# Altium PCB RGB.PcbDoc
Units mm, origin at the board's own origin, x right, y up, seen from the top; angles counter-clockwise.
Board outline 37.21 x 27.94 mm, 2 copper layers (Top Layer, Bottom Layer); 50 components, 28 nets, 160 pads, 54 vias.
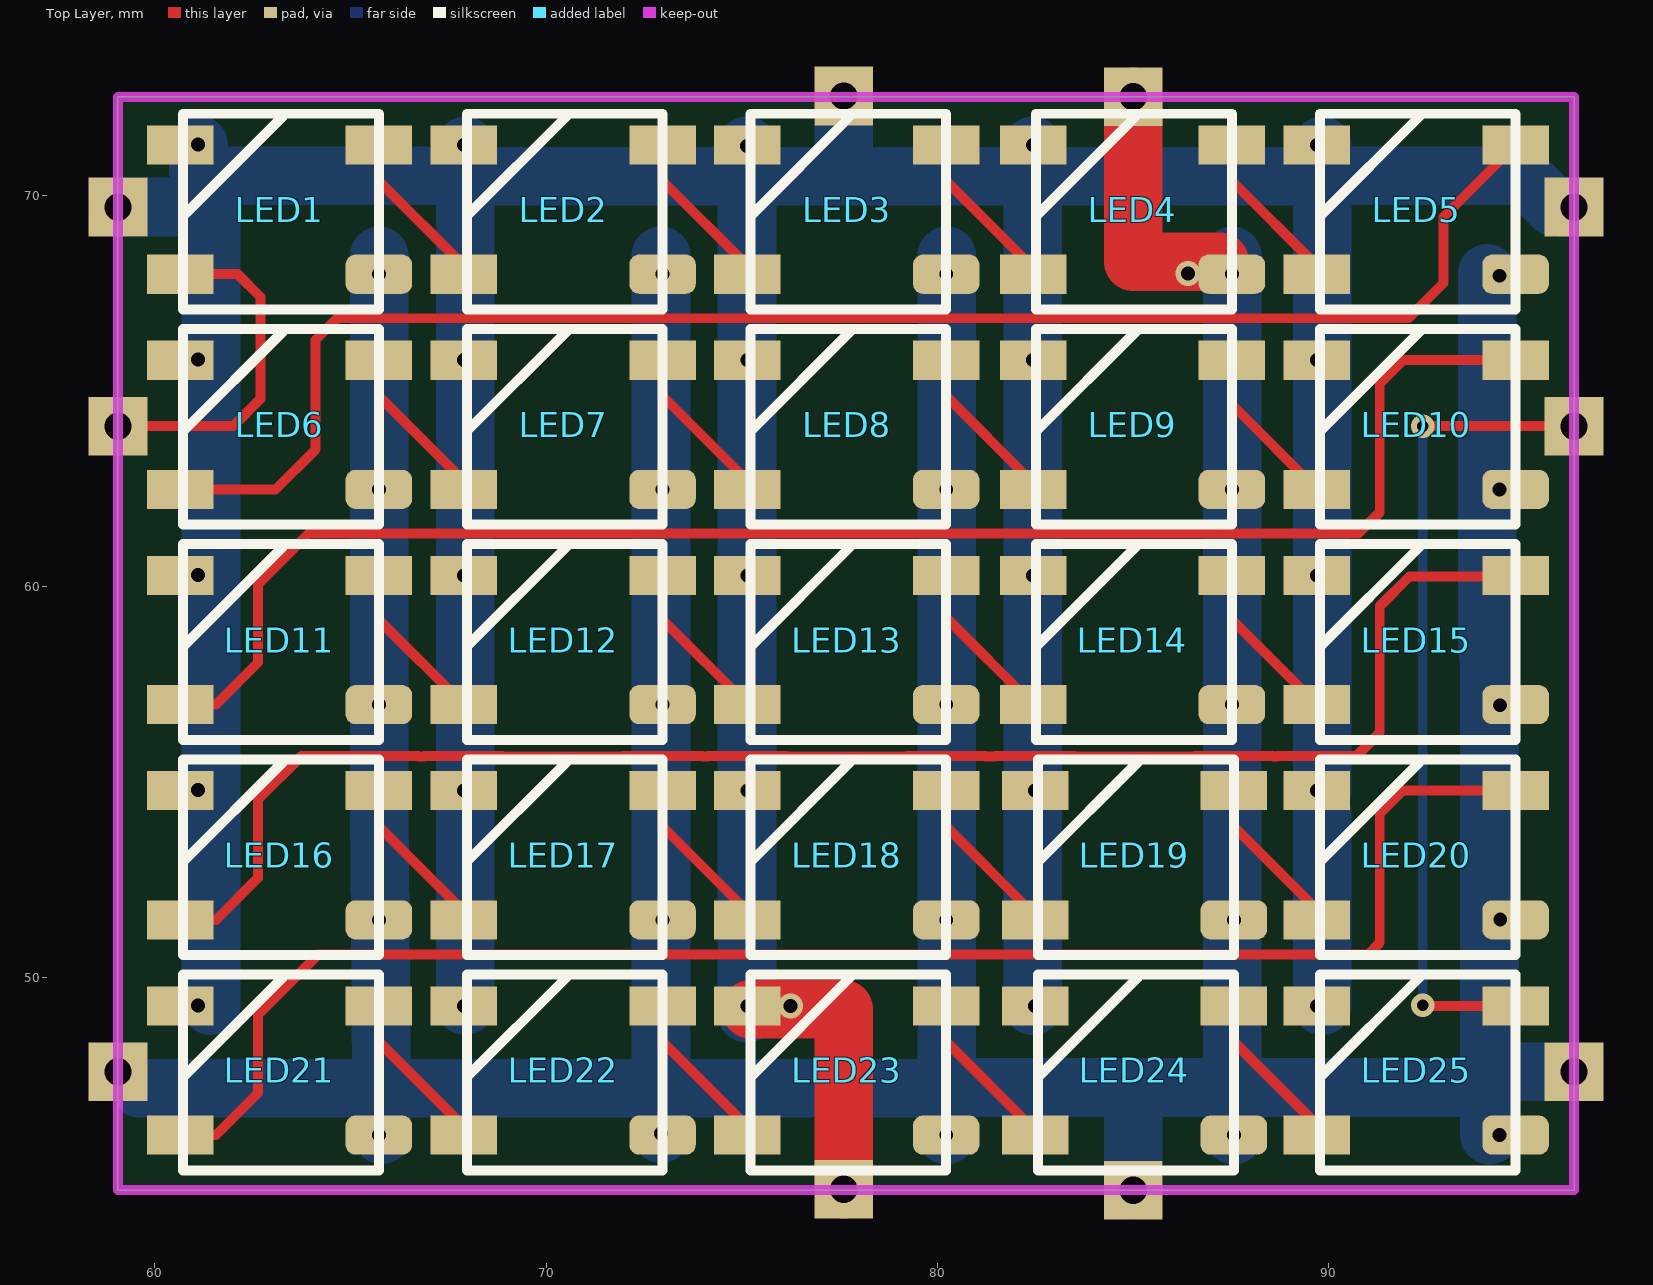
[diagram p0: Top Layer view]
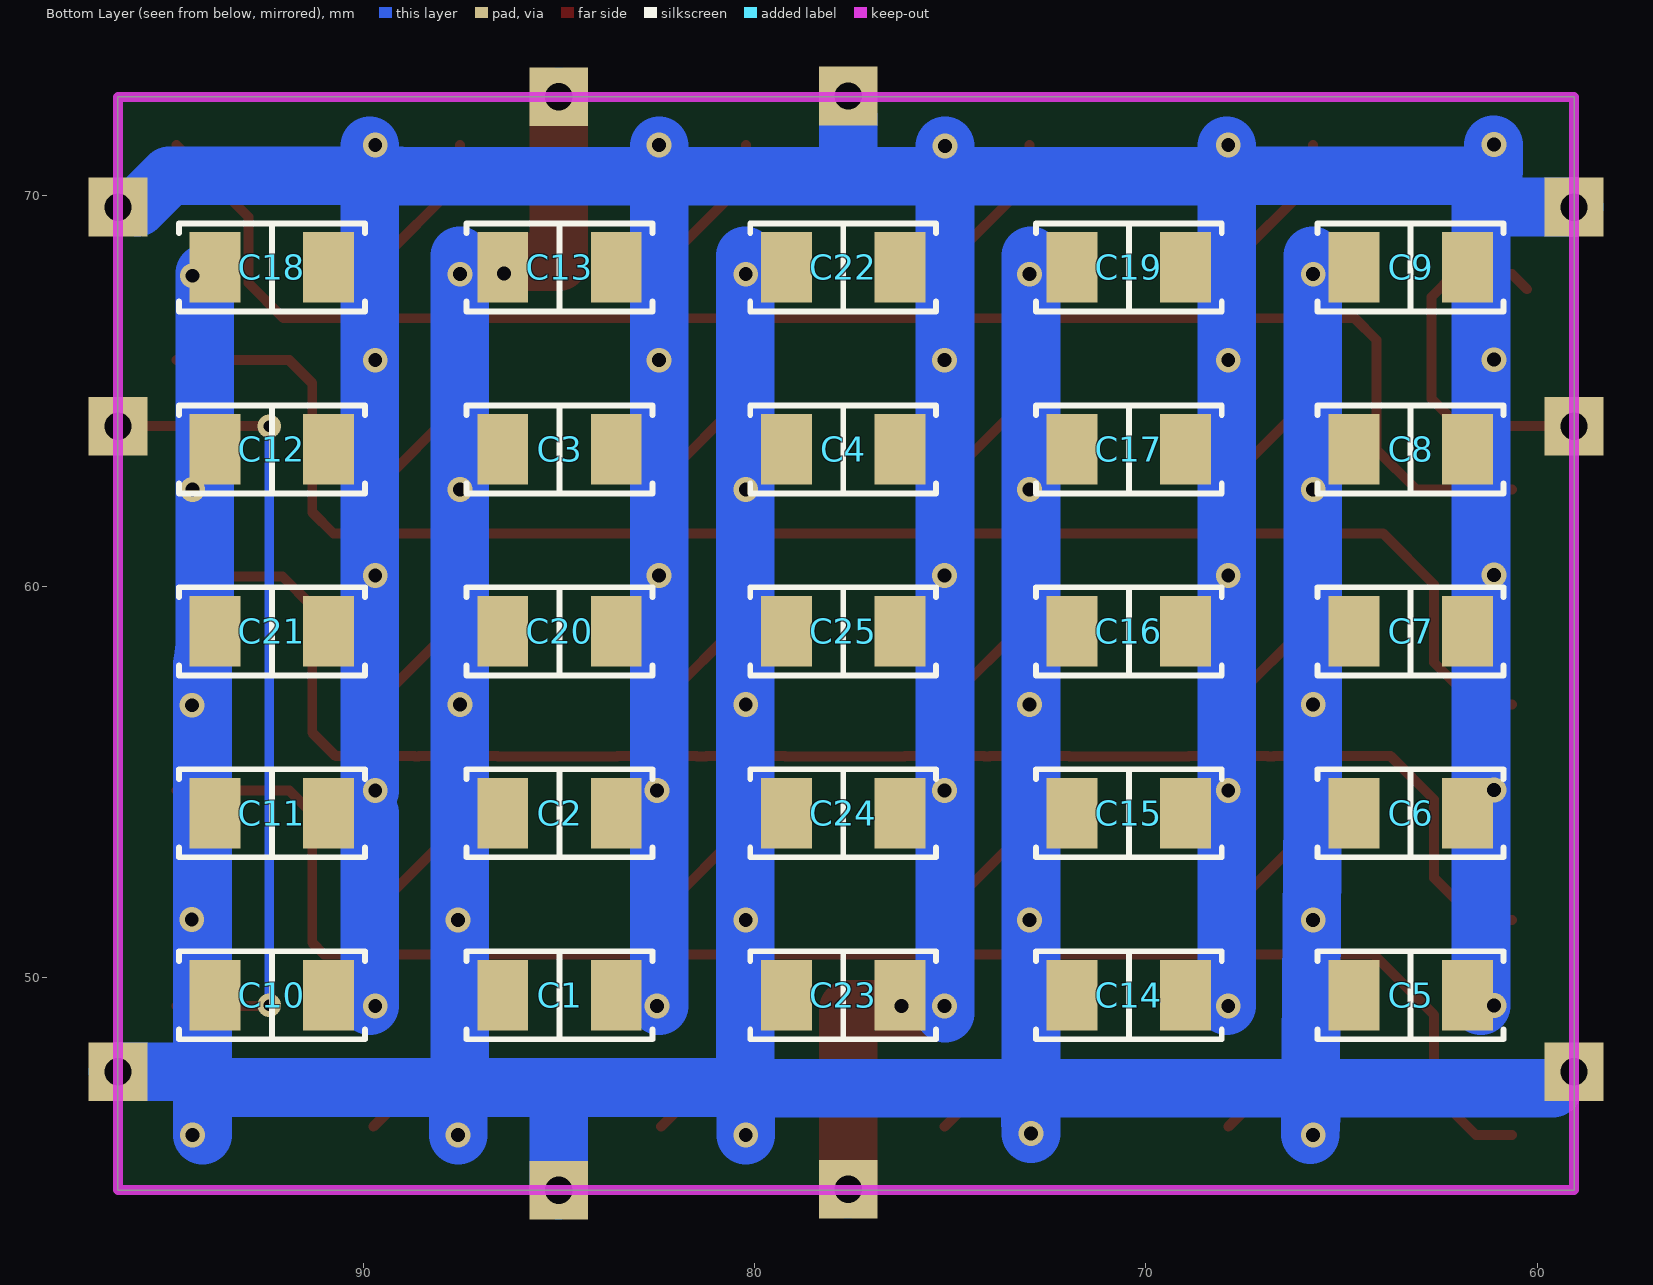
[diagram p1: Bottom Layer view, seen from below]
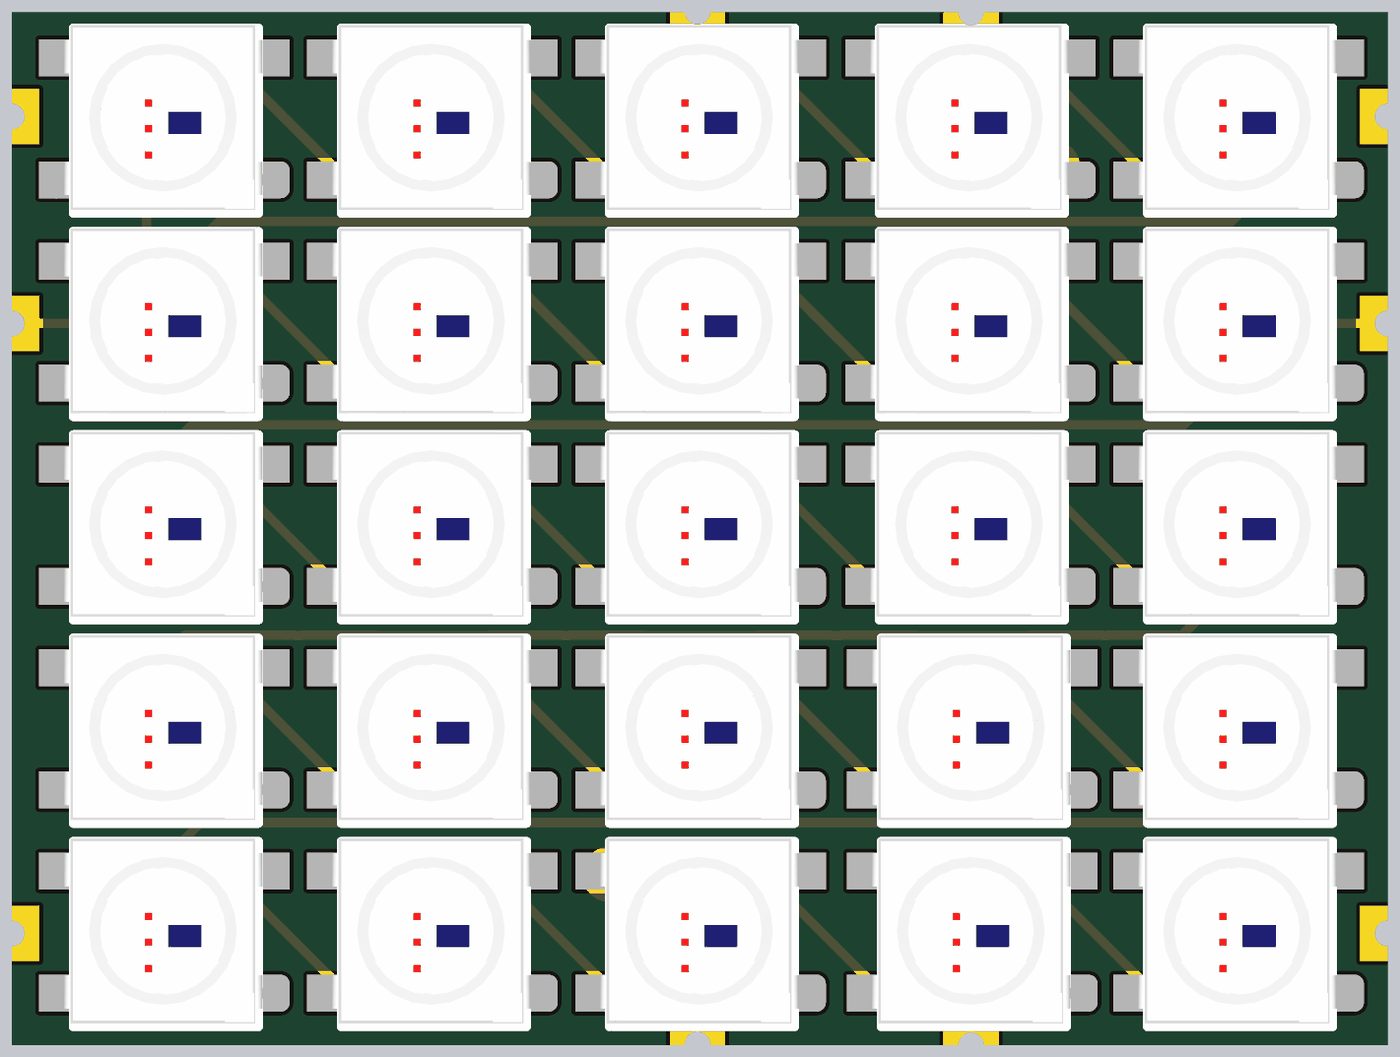
[diagram p2: 3D render of the assembled board from above, using the file's embedded part models]
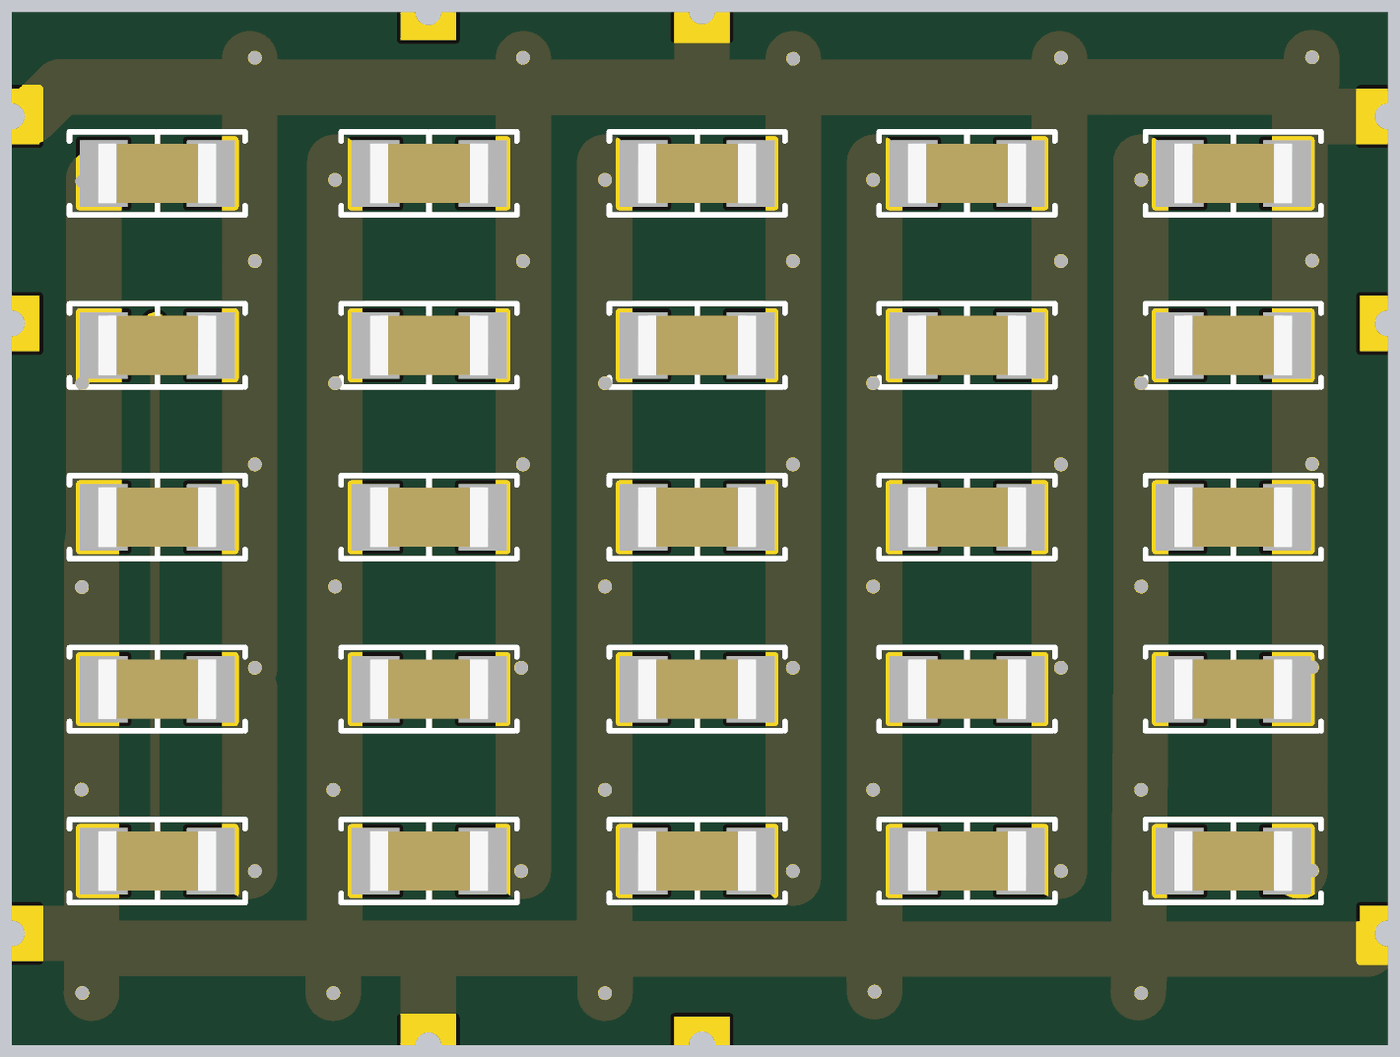
[diagram p3: 3D render of the assembled board from below, using the file's embedded part models]

## Layer stack, top to bottom
Top Solder: solder mask 0.0102, Solder Resist, Dk 3.5
Top Layer: signal copper 0.0356
Dielectric 1: dielectric 0.32, FR-4, Dk 4.8
Bottom Layer: signal copper 0.0356
Bottom Solder: solder mask 0.0102, Solder Resist, Dk 3.5

## Board outline
59.055,44.577 59.055,72.517 96.266,72.517 96.266,44.577

## Design rules (kind name [scope] priority, off if disabled: settings)
Clearance [All] p1: gap=0.254 ignorepadtopadclearanceinfootprint=FALSE except(0: Arc-Hole Track-Hole SMDPad-Hole THPad-Hole Via-Hole Fill-Hole Poly-Hole Region-Hole Text-Hole)
PolygonConnect [All] p1: connectstyle=Relief reliefconductorwidth=0.254 reliefentries=4 polygonreliefangle="90 Angle" airgapwidth=0.254
RoutingVias [All] p1: holewidth=0.711 width=1.27 viastyle="Through Hole" minholewidth=0.711 minwidth=1.27 maxholewidth=0.711 maxwidth=1.27
SolderMaskExpansion [All] p1: expansion=0.102
Width [All] p1: maxlimit=0.254 minlimit=0.254 preferedwidth=0.254
30 further rules are at their usual default settings.

## Components (designator, comment, footprint, x,y, rotation, side; value= is the part's Value field where it differs from the comment)
C1 "100nF" "CAP 1206/3216" 84.982,49.559 r0 bottom value=0.1uF
C2 "100nF" "CAP 1206/3216" 84.982,54.209 r0 bottom value=0.1uF
C3 "100nF" "CAP 1206/3216" 84.982,63.508 r0 bottom value=0.1uF
C4 "100nF" "CAP 1206/3216" 77.732,63.508 r0 bottom value=0.1uF
C5 "100nF" "CAP 1206/3216" 63.232,49.559 r0 bottom value=0.1uF
C6 "100nF" "CAP 1206/3216" 63.232,54.209 r0 bottom value=0.1uF
C7 "100nF" "CAP 1206/3216" 63.232,58.858 r0 bottom value=0.1uF
C8 "100nF" "CAP 1206/3216" 63.232,63.508 r0 bottom value=0.1uF
C9 "100nF" "CAP 1206/3216" 63.232,68.158 r0 bottom value=0.1uF
C10 "100nF" "CAP 1206/3216" 92.332,49.559 r0 bottom value=0.1uF
C11 "100nF" "CAP 1206/3216" 92.332,54.209 r0 bottom value=0.1uF
C12 "100nF" "CAP 1206/3216" 92.332,63.508 r0 bottom value=0.1uF
C13 "100nF" "CAP 1206/3216" 84.982,68.158 r0 bottom value=0.1uF
C14 "100nF" "CAP 1206/3216" 70.432,49.559 r0 bottom value=0.1uF
C15 "100nF" "CAP 1206/3216" 70.432,54.209 r0 bottom value=0.1uF
C16 "100nF" "CAP 1206/3216" 70.432,58.858 r0 bottom value=0.1uF
C17 "100nF" "CAP 1206/3216" 70.432,63.508 r0 bottom value=0.1uF
C18 "100nF" "CAP 1206/3216" 92.332,68.158 r0 bottom value=0.1uF
C19 "100nF" "CAP 1206/3216" 70.432,68.158 r0 bottom value=0.1uF
C20 "100nF" "CAP 1206/3216" 84.982,58.858 r0 bottom value=0.1uF
C21 "100nF" "CAP 1206/3216" 92.332,58.858 r0 bottom value=0.1uF
C22 "100nF" "CAP 1206/3216" 77.732,68.158 r0 bottom value=0.1uF
C23 "100nF" "CAP 1206/3216" 77.732,49.559 r0 bottom value=0.1uF
C24 "100nF" "CAP 1206/3216" 77.732,54.209 r0 bottom value=0.1uF
C25 "100nF" "CAP 1206/3216" 77.732,58.858 r0 bottom value=0.1uF
LED1 "WS2812B" WS2812B 63.182,69.509 r180 top
LED2 "WS2812B" WS2812B 70.432,69.509 r180 top
LED3 "WS2812B" WS2812B 77.682,69.509 r180 top
LED4 "WS2812B" WS2812B 84.982,69.509 r180 top
LED5 "WS2812B" WS2812B 92.232,69.509 r180 top
LED6 "WS2812B" WS2812B 63.182,64.009 r180 top
LED7 "WS2812B" WS2812B 70.432,64.009 r180 top
LED8 "WS2812B" WS2812B 77.682,64.009 r180 top
LED9 "WS2812B" WS2812B 84.982,64.009 r180 top
LED10 "WS2812B" WS2812B 92.232,64.009 r180 top
LED11 "WS2812B" WS2812B 63.182,58.509 r180 top
LED12 "WS2812B" WS2812B 70.432,58.509 r180 top
LED13 "WS2812B" WS2812B 77.682,58.509 r180 top
LED14 "WS2812B" WS2812B 84.982,58.509 r180 top
LED15 "WS2812B" WS2812B 92.232,58.509 r180 top
LED16 "WS2812B" WS2812B 63.182,53.009 r180 top
LED17 "WS2812B" WS2812B 70.432,53.009 r180 top
LED18 "WS2812B" WS2812B 77.682,53.009 r180 top
LED19 "WS2812B" WS2812B 85.032,53.009 r180 top
LED20 "WS2812B" WS2812B 92.232,53.009 r180 top
LED21 "WS2812B" WS2812B 63.182,47.509 r180 top
LED22 "WS2812B" WS2812B 70.432,47.509 r180 top
LED23 "WS2812B" WS2812B 77.682,47.509 r180 top
LED24 "WS2812B" WS2812B 85.032,47.509 r180 top
LED25 "WS2812B" WS2812B 92.232,47.509 r180 top

## Footprints (in the part's own frame and the unit in brackets; to place one, negate y for a bottom-side part, rotate by r counter-clockwise, add the part's x,y. Pads: shape width x height; smd on the part's side, far side on the other; paste and mask are expansions set on the pad)
"CAP 1206/3216" [mm] "Chip Capacitor, 2-Leads, Body 3.25x1.60mm, IPC Medium Density"
  rect 1.3x1.8 smd: 1(-1.45,0) 2(1.45,0)
  silkscreen extent -2.37,-1.12 2.37,1.12, body extent -1.6,-0.81 1.6,0.81, height 1.62
WS2812B [mm]
  rrect50% 1.7x1 smd: 1(-2.54,1.524)
  rect 1.7x1 smd: 2(-2.54,-1.778) 3(2.54,-1.778) 4(2.54,1.524)
  silkscreen extent -2.54,-2.58 2.46,2.42, body extent -2.66,-2.66 2.74,2.34, height 1.6

## Part data
C1 C2 C3 C4 C5 C6 C7 C8 C9 C10 C11 C12 C13 C14 C15 C16 C17 C18 C19 C20 C21 C22 C23 C24 C25: library part Capacitor, "SMT Capacitor"

## Free pads (board coordinates)
  rect 1.5x1.5 hole 0.7: ""(59.055,47.6) ""(59.055,64.1) ""(59.055,69.7) ""(77.6,44.6) ""(77.6,72.54) ""(85,44.577) ""(85,72.517) ""(96.266,47.6) ""(96.266,64.1) ""(96.266,69.7)

## Via types
v1: diameter 0.635, hole 0.356, Top Layer to Bottom Layer, tented both sides, 52 vias
v2: diameter 0.6, hole 0.3, Top Layer to Bottom Layer, 2 vias

## Nets (pads, with @x,y where several pads share a name; then routed paths per layer and width w, separated by ;. In a path a pad name is that pad's centre, name@x,y a point inside that pad or via, vN(x,y) a via of type N, cw(c..) or ccw(c..) an arc to the next point about the centre after c; other vN are vias at no path point)
Din: LED1.4 pad.@59.055,64.1 | length 8.9
  Top Layer w0.254: pad.@59.563,64.1 62,64.1 62.7,64.8 62.7,67.4 62.115,67.985 LED1.4 LED1.4@60.257,67.6
Dout: LED25.2 pad.@96.266,64.1 | length 21.2
  Top Layer w0.254: v2@92.3,49.3 92.313,49.287 LED25.2 ; v2(92.4,64.1) pad.@96.266,64.1
  Bottom Layer w0.254: v2@92.3,49.3 92.4,49.4 v2(92.4,64.1)
  other v2: 92.4,49.3
GND: C1.1 C2.1 C3.1 C4.1 C5.1 C6.1 C7.1 C8.1 C9.1 C10.1 C11.1 C12.1 C13.1 C14.1 C15.1 C16.1 C17.1 C18.1 C19.1 C20.1 C21.1 C22.1 C23.1 C24.1 C25.1 LED1.3 LED2.3 LED3.3 LED4.3 LED5.3 LED6.3 LED7.3 LED8.3 LED9.3 LED10.3 LED11.3 LED12.3 LED13.3 LED14.3 LED15.3 LED16.3 LED17.3 LED18.3 LED19.3 LED20.3 LED21.3 LED22.3 LED23.3 LED24.3 LED25.3 pad.@59.055,69.7 pad.@77.6,44.6 pad.@77.6,72.54 pad.@96.266,69.7 | length 159.1
  Top Layer w0.254: v1(75.142,49.287) LED23.3@75.229,49.2
  Top Layer w1.5: LED23.3@75.229,49.2 77.6,49.2 pad.@77.6,44.6
  Bottom Layer w0.254: v1(61.1,71.3) 61.1,70.5 61.3,70.3 ; 89.073,70.5 v1@89.794,71.222 ; 89.692,70.487 89.693,70.5 v1@89.794,71.222 ; v1@89.804,71.287 89.801,71.272 v1@89.794,71.222 ; v1@89.832,71.259 v1@89.794,71.222
  Bottom Layer w1.5: pad.@59.055,69.7 61.432,69.7 ; v1@61.113,71.287 61.113,70.619 61.432,70.3 ; C5.1@61.432,49.287 61.432,69.7 ; v1@67.932,49.287 67.932,70.487 ; v1@67.932,71.259 67.932,70.487 ; v1@75.132,49.1 75.132,70.487 ; v1(75.132,71.259) 75.132,70.487 ; pad.@77.6,72.009 77.6,70.487 ; v1@82.432,49.287 82.432,70.488 ; v1@82.432,71.259 82.432,70.488 ; 89.073,70.5 89.693,70.5 89.832,70.5 ; 89.692,70.487 82.442,70.487 82.432,70.488 ; v1@89.832,49.287 89.832,54.209 ; v1@89.832,54.787 89.832,70.5 ; v1@89.832,71.259 89.832,70.5 ; pad.@95.758,69.7 94.958,70.5 89.832,70.5 ; 61.432,69.7 61.432,70.3 ; 61.432,70.3 61.432,70.5 67.105,70.5 67.878,70.487 67.892,70.487 67.932,70.487 ; 67.932,70.487 75.132,70.487 ; 75.132,70.487 75.142,70.487 77.6,70.487 ; 77.6,70.487 82.432,70.488
  other v1: 67.892,49.287 76.242,49.287 82.492,49.287 89.692,49.287 61.1,49.3 61.1,54.8 67.892,54.787 75.142,54.787 82.492,54.787 89.692,54.787 61.1,60.3 67.892,60.287 75.142,60.287 82.442,60.287 89.692,60.287 67.892,65.787 75.142,65.787 82.442,65.787 89.692,65.787 61.1,65.8 67.892,71.287 82.442,71.287 89.692,71.287
NetLED1_2: LED1.2 LED2.4 | length 4.2
  Top Layer w0.254: LED1.2 65.722,70.369 67.892,68.199 LED2.4
NetLED2_2: LED2.2 LED3.4 | length 4
  Top Layer w0.254: LED2.2 72.972,70.369 LED3.4@75.142,68.199
NetLED3_2: LED3.2 LED4.4 | length 4
  Top Layer w0.254: LED3.2 80.222,70.369 LED4.4@82.392,68.199
NetLED4_2: LED4.2 LED5.4 | length 4
  Top Layer w0.254: LED4.2 87.522,70.369 LED5.4@89.692,68.199
NetLED5_2: LED5.2 LED6.4 | length 40.4
  Top Layer w0.254: LED6.4 63.085,62.485 64.1,63.5 64.1,66.3 64.659,66.859 92.032,66.859 92.932,67.759 92.932,69.447 LED5.2
NetLED6_2: LED6.2 LED7.4 | length 4
  Top Layer w0.254: LED6.2 65.722,64.869 LED7.4@67.892,62.699
NetLED7_2: LED7.2 LED8.4 | length 4
  Top Layer w0.254: LED7.2 72.972,64.869 LED8.4@75.142,62.699
NetLED8_2: LED8.2 LED9.4 | length 4
  Top Layer w0.254: LED8.2 80.222,64.869 LED9.4@82.392,62.699
NetLED9_2: LED9.2 LED10.4 | length 4.2
  Top Layer w0.254: LED9.2 87.522,64.655 LED10.4
NetLED10_2: LED10.2 LED11.4 | length 40.9
  Top Layer w0.254: LED11.4 61.558,56.985 62.632,58.059 62.632,60.059 63.932,61.359 90.759,61.359 91.3,61.9 91.3,65.2 91.887,65.787 LED10.2
NetLED11_2: LED11.2 LED12.4 | length 4.2
  Top Layer w0.254: LED11.2 65.722,59.155 LED12.4
NetLED12_2: LED12.2 LED13.4 | length 4.2
  Top Layer w0.254: LED12.2 72.972,59.155 LED13.4
NetLED13_2: LED13.2 LED14.4 | length 4.2
  Top Layer w0.254: LED13.2 80.222,59.205 LED14.4
NetLED14_2: LED14.2 LED15.4 | length 4.2
  Top Layer w0.254: LED14.2 87.522,59.155 LED15.4
NetLED15_2: LED15.2 LED16.4 | length 40.5
  Top Layer w0.254: LED16.4 61.558,51.485 62.632,52.559 62.632,54.559 63.741,55.668 66.729,55.668 66.738,55.659 66.875,55.659 66.884,55.668 68.899,55.668 68.908,55.659 71.955,55.659 71.964,55.668 73.979,55.668 73.988,55.659 74.125,55.659 74.134,55.668 76.149,55.668 76.158,55.659 79.205,55.659 79.214,55.668 81.229,55.668 81.238,55.659 81.475,55.659 81.484,55.668 83.499,55.668 83.508,55.659 86.555,55.659 86.564,55.668 88.579,55.668 88.588,55.659 88.675,55.659 88.684,55.668 90.699,55.668 91.3,56.269 91.3,59.5 92.059,60.259 LED15.2@94.432,60.259
NetLED16_2: LED16.2 LED17.4 | length 4
  Top Layer w0.254: LED16.2 65.722,53.869 LED17.4@67.892,51.699
NetLED17_2: LED17.2 LED18.4 | length 4
  Top Layer w0.254: LED17.2 72.972,53.869 LED18.4@75.142,51.699
NetLED18_2: LED18.2 LED19.4 | length 4
  Top Layer w0.254: LED18.2 80.222,53.869 LED19.4@82.392,51.699
NetLED19_2: LED19.2 LED20.4 | length 4
  Top Layer w0.254: LED19.2 87.572,53.869 LED20.4@89.742,51.699
NetLED20_2: LED20.2 LED21.4 | length 40.9
  Top Layer w0.254: LED21.4 61.558,45.985 62.632,47.059 62.632,49.059 64.173,50.6 91,50.6 91.3,50.9 91.3,54.2 91.887,54.787 LED20.2
NetLED21_2: LED21.2 LED22.4 | length 4
  Top Layer w0.254: LED21.2 65.722,48.369 LED22.4@67.892,46.199
NetLED22_2: LED22.2 LED23.4 | length 4
  Top Layer w0.254: LED22.2 72.972,48.369 LED23.4@75.142,46.199
NetLED23_2: LED23.2 LED24.4 | length 4
  Top Layer w0.254: LED23.2 80.222,48.369 LED24.4@82.392,46.199
NetLED24_2: LED24.2 LED25.4 | length 4
  Top Layer w0.254: LED24.2 87.572,48.369 LED25.4@89.742,46.199
VCC: C1.2 C2.2 C3.2 C4.2 C5.2 C6.2 C7.2 C8.2 C9.2 C10.2 C11.2 C12.2 C13.2 C14.2 C15.2 C16.2 C17.2 C18.2 C19.2 C20.2 C21.2 C22.2 C23.2 C24.2 C25.2 LED1.1 LED2.1 LED3.1 LED4.1 LED5.1 LED6.1 LED7.1 LED8.1 LED9.1 LED10.1 LED11.1 LED12.1 LED13.1 LED14.1 LED15.1 LED16.1 LED17.1 LED18.1 LED19.1 LED20.1 LED21.1 LED22.1 LED23.1 LED24.1 LED25.1 pad.@59.055,47.6 pad.@85,44.577 pad.@85,72.517 pad.@96.266,47.6 | length 160.2
  Top Layer w0.254: LED4.1@87.207,68.3 v1(87.522,67.985)
  Top Layer w1.5: pad.@85,72.517 85,68.3 LED4.1@87.207,68.3
  Bottom Layer w0.254: pad.@59.563,47.137 pad.@59.563,47.6 ; 91.9,47.2 92.2,46.9 ; 94.107,47.7 94.207,47.6
  Bottom Layer w1.5: pad.@59.626,47.2 59.604,47.178 65.732,47.178 ; 65.732,68.459 65.732,54.209 65.754,51.485 65.77,49.568 65.79,47.178 ; 72.932,68.459 72.932,47.178 ; v1(80.222,45.985) 80.222,47.138 ; 80.222,47.185 72.972,47.185 ; 80.232,68.459 80.232,47.2 87,47.2 ; pad.@85,44.577 85,46.877 ; 87.532,68.459 87.532,47.2 91.9,47.2 94,47.2 ; v1(87.572,45.985) 87.572,47.138 ; C18.2@94.05,68.011 94.05,58.431 94.107,58.031 94.107,47.7 v1@94.107,45.995 ; v1@94.107,45.985 v1@94.107,45.995 ; v1@94.112,45.99 v1@94.107,45.995 ; 94.207,47.6 pad.@96.266,47.6 ; 65.732,47.178 65.79,47.178 ; 65.732,47.178 65.8,46 65.79,47.178 ; 65.79,47.178 72.932,47.178 ; 72.932,47.178 v1(72.932,46.025) 72.972,47.185 ; 72.932,47.178 72.972,47.185
  other v1: 65.722,45.985 94.36,45.99 65.722,51.485 72.972,51.485 80.222,51.485 87.572,51.485 94.38,51.49 94.37,56.97 65.722,56.985 72.972,56.985 80.222,56.985 87.522,56.985 65.722,62.485 72.972,62.485 80.222,62.485 87.522,62.485 94.361,62.484 94.361,67.945 65.722,67.985 72.972,67.985 80.222,67.985 86.4,68

## Keep-outs
Keep-Out Layer:
  the board outline again, w0.254

## Silkscreen, mask and mechanical layers (free items; w line width, h text height)
Mechanical 1:
  lines w1.2: 59.817,45.085 59.817,72.009 95.504,72.009 95.504,45.085 59.817,45.085